# Altium PCB displayLCD.PcbDoc
Units mil, origin at the board's own origin, x right, y up, seen from the top; angles counter-clockwise.
Board outline 3797.48 x 1180 mil, 2 copper layers (Top Layer, Bottom Layer); 21 components, 19 nets, 127 pads, 53 vias.
Unrouted connection lines stored in the file: 9.
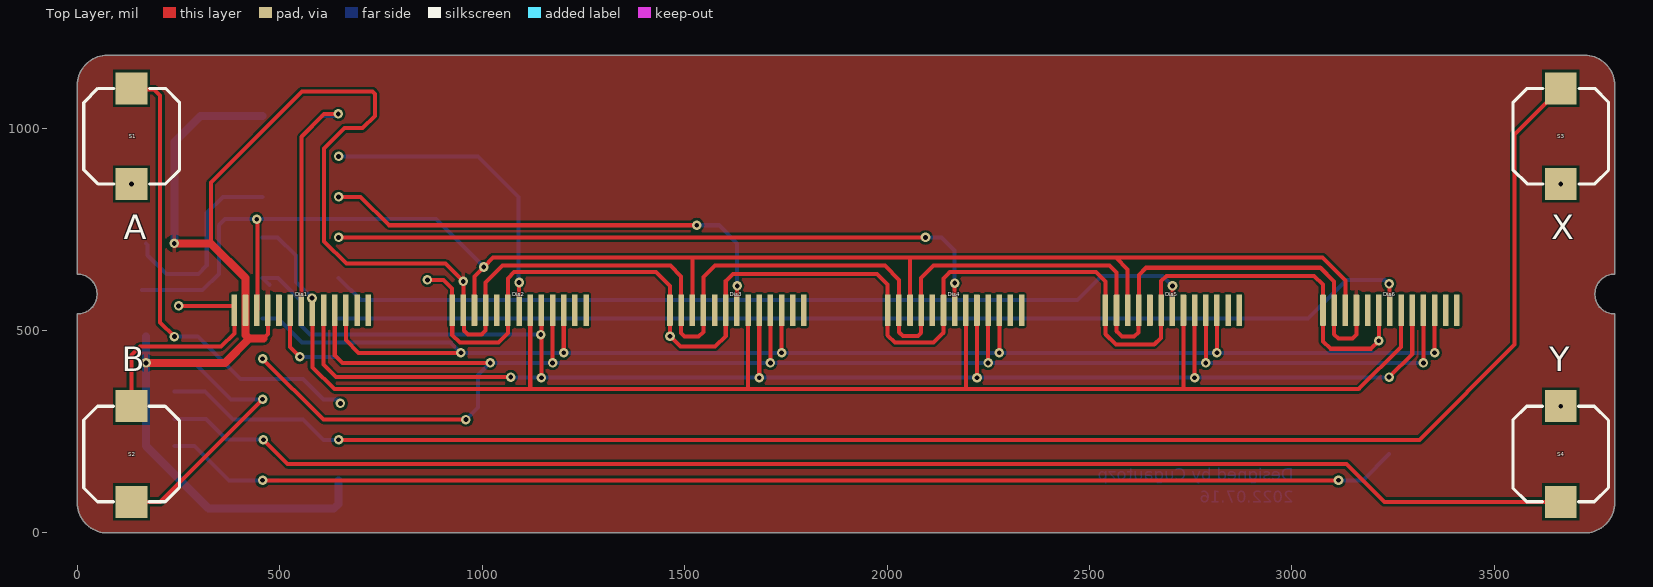
[diagram p0: Top Layer view]
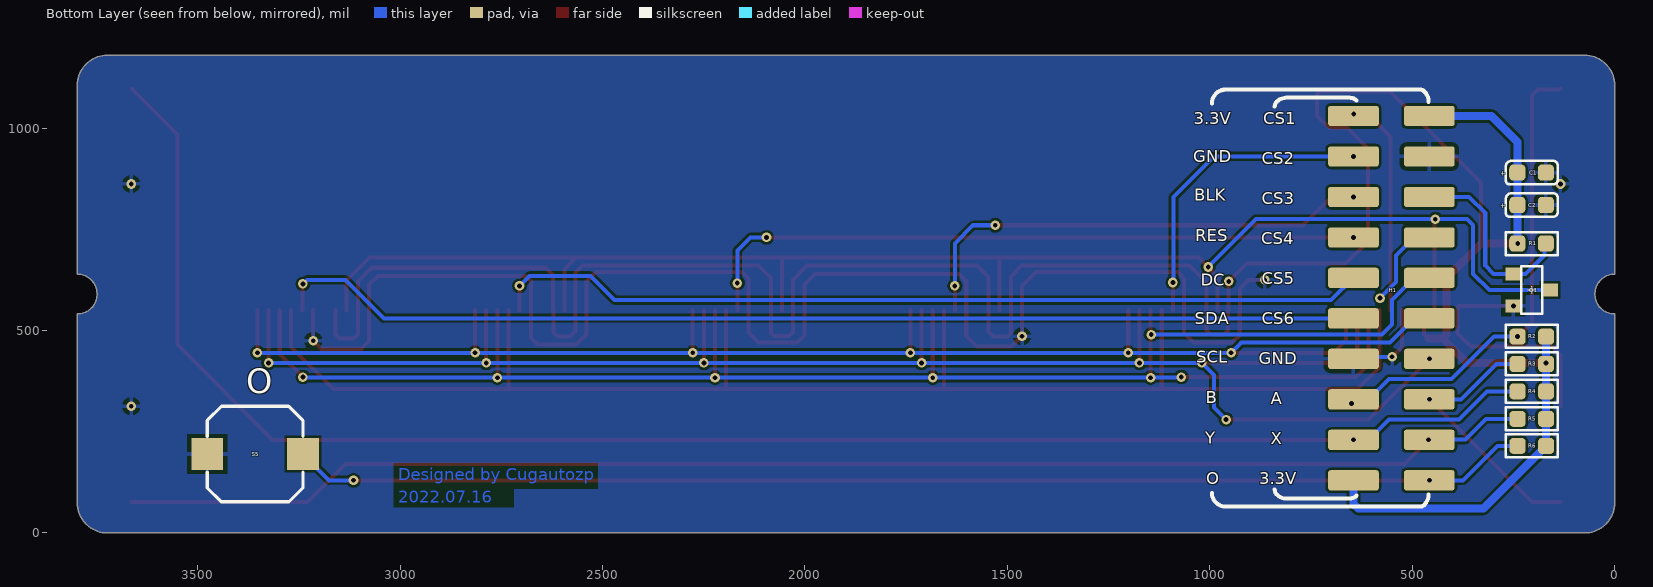
[diagram p1: Bottom Layer view, seen from below]
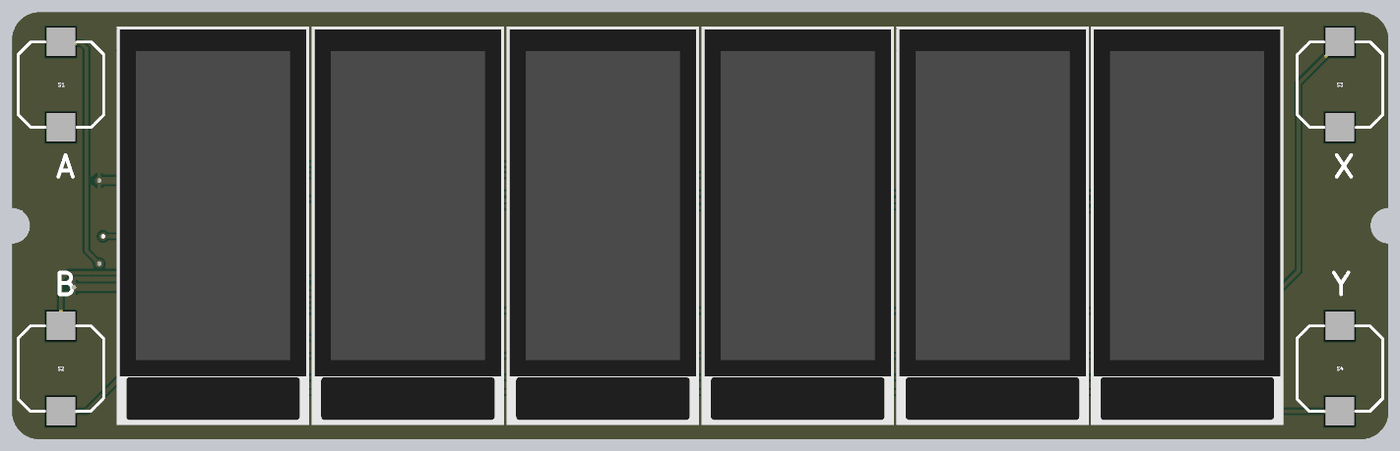
[diagram p2: 3D render of the assembled board from above, using the file's embedded part models]
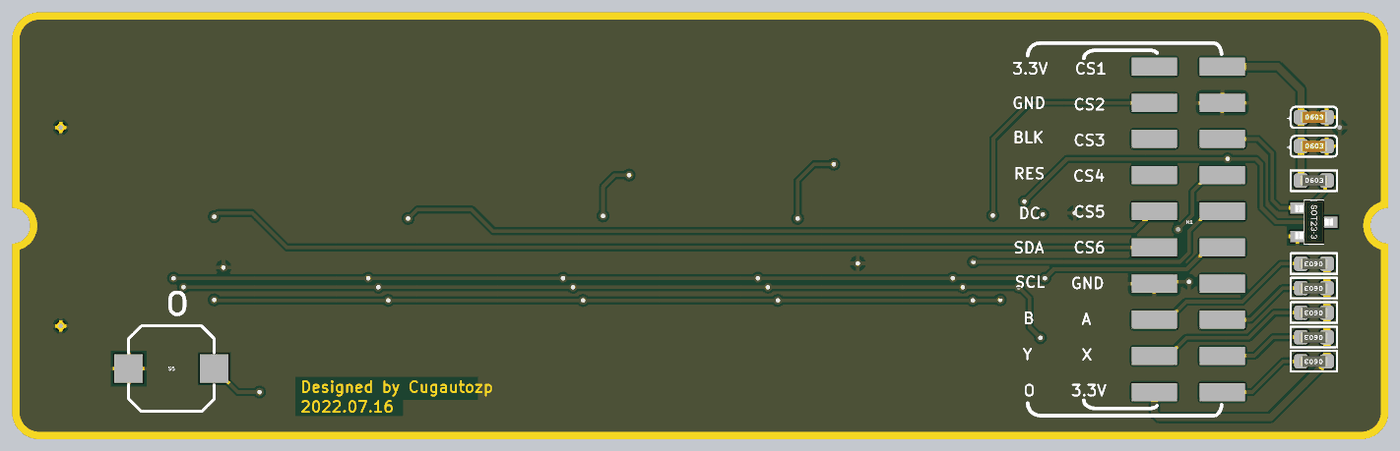
[diagram p3: 3D render of the assembled board from below, using the file's embedded part models]

## Layer stack, top to bottom
Top Solder: solder mask 0.4, Solder Resist, Dk 3.5
Top Layer: signal copper 1.4
Dielectric 1: dielectric 12.6, FR-4, Dk 4.8
Bottom Layer: signal copper 1.4
Bottom Solder: solder mask 0.4, Solder Resist, Dk 3.5

## Board outline
0,75 0,540.79 ccw(c0,590) 0,639.21 0,1105 cw(c75,1105) 75,1180 3722.48,1180 cw(c3722.48,1105) 3797.48,1105 3797.48,639.21 ccw(c3797.48,590) 3797.48,540.79 3797.48,75 cw(c3722.48,75) 3722.48,0 75,0 cw(c75,75)

## Design rules (kind name [scope] priority, off if disabled: settings)
Clearance [All] p1: gap=6 ignorepadtopadclearanceinfootprint=FALSE except(0: Arc-Hole Track-Hole SMDPad-Hole THPad-Hole Via-Hole Fill-Hole Poly-Hole Region-Hole Text-Hole)
PolygonConnect PolygonConnect_1 [All vs IsNamedPolygon('Top Layer-VCC')] p1: connectstyle=Relief reliefconductorwidth=10 reliefentries=4 polygonreliefangle="90 Angle" airgapwidth=10
PolygonConnect [All] p2: connectstyle=Relief reliefconductorwidth=10 reliefentries=4 polygonreliefangle="90 Angle" airgapwidth=10
RoutingVias [All] p1: holewidth=28 width=50 viastyle="Through Hole" minholewidth=28 minwidth=50 maxholewidth=28 maxwidth=50
SolderMaskExpansion [All] p1: expansion=4 istentingtop=FALSE
Width [All] p1: maxlimit=60 minlimit=10 preferedwidth=10
30 further rules are at their usual default settings.

## Components (designator, comment, footprint, x,y, rotation, side; value= is the part's Value field where it differs from the comment)
C1 "Cap Pol3" Cap0603 205.53,890 r180 bottom value=0.1uF
C2 "Cap Pol3" Cap0603 205.53,810 r180 bottom value=0.1uF
Dis1 "LCD80*160" LCD屏80*160 819.25,39.76 r90 top locked
Dis2 "LCD80*160" LCD屏80*160 1357.19,39.76 r90 top locked
Dis3 "LCD80*160" LCD屏80*160 1895.12,39.76 r90 top locked
Dis4 "LCD80*160" LCD屏80*160 2432.83,39.76 r90 top locked
Dis5 "LCD80*160" LCD屏80*160 2970.34,39.76 r90 top locked
Dis6 "LCD80*160" LCD屏80*160 3507.83,39.76 r90 top locked
H1 "双排2*10" pin20双排母 555,580 r270 bottom locked
Q1 "LN4812LT1G" sot23 160,600 r270 bottom
R1 "10k" R0603 207.28,715 r180 bottom value=10K
R2 "10k" R0603 203.28,485 r0 bottom value=10K
R3 "10k" R0603 203.28,417.25 r0 bottom value=10K
R4 "10k" R0603 203.28,349.5 r0 bottom value=10K
R5 "10k" R0603 203.28,281.75 r0 bottom value=10K
R6 "10k" R0603 203.28,215 r0 bottom value=10K
S1 "S1" key(按键) 134.25,980 r270 top
S2 "S2" key(按键) 134.25,195 r90 top
S3 "S3" key(按键) 3663.78,980 r270 top
S4 "S4" key(按键) 3663.78,195 r90 top
S5 "S5" key(按键) 3358.11,195 r0 bottom

## Footprints (in the part's own frame and the unit in brackets; to place one, negate y for a bottom-side part, rotate by r counter-clockwise, add the part's x,y. Pads: shape width x height; smd on the part's side, far side on the other; paste and mask are expansions set on the pad)
Cap0603 [mil]
  rrect50% 40x40 smd: 1(-35.25,0) 2(35.25,0)
  silkscreen extent -64,-29 64,29, body extent -39,-15 40,16, height 31
key(按键) [mm]
  rect 2x2 smd: 1(-3,0) 2(3,0)
  silkscreen extent -3,-3 3,3
LCD屏80*160 [mm]
  rrect25% 2x0.35 smd: 1(12.96,2.55) 2(12.96,3.25) 3(12.96,3.95) 4(12.96,4.65) 5(12.96,5.35) 6(12.96,6.05) 7(12.96,6.75) 8(12.96,7.45) 9(12.96,8.15) 10(12.96,8.85) 11(12.96,9.55) 12(12.96,10.25) 13(12.96,10.95)
  body extent -0.01,-0.01 27.95,13.47, height 1.87
pin20双排母 [mil]
  rrect25% 50x125.2 smd mask+0: 1(-450,-90.49) 2(-450,97.01) 3(-350,-90.49) 4(-350,97.01) 5(-250,-90.49) 6(-250,97.01) 7(-150,-90.49) 8(-150,97.01) 9(-50,-90.49) 10(-50,97.01) 11(50,-90.49) 12(50,97.01) 13(150,-90.49) 14(150,97.01) 15(250,-90.49) 16(250,97.01) 17(350,-90.49) 18(350,97.01) 19(450,-90.49) 20(450,97.01)
R0603 [mil]
  rrect50% 40x40 smd: 1(-33.5,0) 2(37,0)
  silkscreen extent -62,-29 66,28, body extent -38,-15 41,16, height 31
sot23 [mm]
  rect 0.8x1 smd: 1(-1,-2.3) 2(1,-2.3) 3(0,0)
  silkscreen extent -1.5,-1.8 1.5,-0.5, body extent -1.52,-2.46 1.52,0.18, height 1.01

## Part data
C1 C2: "Polarized Capacitor (Surface Mount)", LatestRevisionDate=29-May-2009, LatestRevisionNote="IPC-7351 Footprint Added.", PackageDescription="Chip Capacitor", PackageReference=C0805, Published=8-Jun-2000, Publisher="Altium Limited"
Q1: BOM_JLCPCB Part Class="Extended Part", BOM_Manufacturer=LRC(乐山无线电), BOM_Manufacturer Part=LN4812LT1G, BOM_Supplier=LCSC, BOM_Supplier Part=C559076, Contributor=LCSC, spicePre=Q, spiceSymbolName=LN4812LT1G
R1 R2 R3 R4 R5 R6: library part Res2, "Resistor", LatestRevisionDate=17-Jul-2002, LatestRevisionNote="Re-released for DXP Platform.", PackageDescription="Axial Device, Thru-Hole; 2 Leads; 0.4 in Pin Spacing", PackageReference=AXIAL-0.4, Published=8-Jun-2000, Publisher="Altium Limited"
S1 S2 S3 S4 S5: library part SW-PB, "Switch", LatestRevisionDate=17-Jul-2002, LatestRevisionNote="Re-released for DXP Platform.", PackageDescription="Switch; 2 Leads", PackageReference=SPST-2, Published=24-Mar-1999, Publisher="Altium Limited"

## Via types
v1: diameter 23.62, hole 11.81, Top Layer to Bottom Layer, tented both sides, 51 vias
v2: diameter 23.62, hole 11.81, Top Layer to Bottom Layer, 2 vias

## Nets (pads, with @x,y where several pads share a name; then routed paths per layer and width w, separated by ;. In a path a pad name is that pad's centre, name@x,y a point inside that pad or via, vN(x,y) a via of type N, cw(c..) or ccw(c..) an arc to the next point about the centre after c; other vN are vias at no path point)
BLK: H1.6 Q1.1 R1.2 | length 489
  Bottom Layer w10: R1.2 174.14,711.13 174.14,685.86 220.63,639.37 Q1.1 299.37,639.37 320,660 320,790 360,830 H1.6
CS1: Dis1.7 H1.1 | length 583.9
  Top Layer w10: Dis1.7 553.5,978.5 610,1035 v1(645,1035)
  Bottom Layer w10: H1.1@605,1030 H1.1
CS2: Dis2.7 H1.3 | length 766.5
  Top Layer w10: Dis2.7 v1(1091.44,618.56)
  Bottom Layer w10: v1(645.49,930) 990,930 1090,830 1090,620 v1(1091.44,618.56)
CS3: Dis3.7 H1.5 | length 1197.4
  Top Layer w10: v1(645.49,830) 700,830 770,760 v1(1530,760) ; Dis3.7 1630,550.63 v1(1630,610)
  Bottom Layer w10: v1(1530,760) 1585,760 1630,715 v1(1630,610)
CS4: Dis4.7 H1.7 | length 1691.7
  Top Layer w10: v1(645.49,730) v1(2095,730) v1@2100,730 ; Dis4.7 v1(2167.08,617.17) v1@2167.08,621.1
  Bottom Layer w10: v1(2095,730) 2135,730 2167.08,697.92 v1(2167.08,617.17)
CS5: Dis5.7 H1.9 | length 2177.5
  Top Layer w10: Dis5.7 v1@2704.59,610
  Bottom Layer w10: H1.9 700.49,575 2470,575 2530,635 2680,635 v1(2705,610)
CS6: Dis6.7 H1.11 | length 2703.9
  Top Layer w10: v1(3240,615) 3241.04,613.96 3241.04,551.05 Dis6.7
  Bottom Layer w10: H1.11 3040,530 3135,625 3230,625 v1(3240,615)
DC: Dis1.5 Dis2.5 Dis3.5 Dis4.5 Dis5.5 Dis6.5 H1.10 | length 4438.5
  Top Layer w10: Dis1.5 608.62,415.79 639.41,385 v1(1070.79,385) ; v1(1146.56,383.44) Dis2.5 ; v1(1684.49,383.44) Dis3.5 ; v1(2222.2,383.44) Dis4.5 ; v1(2759.71,383.44) Dis5.5 ; v1(3240,385) 3297.2,442.2 Dis6.5
  Bottom Layer w10: H1.10@475,612.99 H1.10 495.59,630 550,575.59 550,515 575,490 v1(1145,490) ; v1(1070.79,385) 1072.35,383.44 v1(1684.49,383.44) v1(2222.2,383.44) v1(2759.71,383.44) v1@3240,383.44
GND: C1.2 C2.2 Dis1.8 Dis1.13 Dis2.8 Dis2.13 Dis3.8 Dis3.13 Dis4.8 Dis4.13 Dis5.8 Dis5.13 Dis6.8 Dis6.13 H1.4 H1.13 Q1.2 S1.2 S2.2 S3.2 S4.2 S5.2 | length 4600.7
  Top Layer w10: S2.2 134.25,439.25 155,460 355,460 388.15,493.15 Dis1.13 388.15,558.74 386.26,560.63 v1(250.55,560.63) ; Dis1.8 525.94,459.06 v1(550,435) ; v1(865,625) 905,625 926.09,603.91 Dis2.13 926.28,549.81 926.28,488.72 945,470 1040,470 1063.88,493.88 Dis2.8 1063.88,628.88 1079,644 1430,644 1464.02,609.98 Dis3.13 v1(1464.02,485.98) 1490,460 1575,460 1601.81,486.81 Dis3.8 1601.81,621.81 1620,640 1975,640 2001.73,613.27 Dis4.13 2001.73,488.27 2020,470 2115,470 2139.52,494.52 Dis4.8 2139.52,628.52 2155,644 2516,644 2539.24,620.76 Dis5.13 2539.24,490.76 2565,465 2660,465 2677.03,482.03 Dis5.8 2677.03,622.03 2690,635 3055,635 3076.73,613.27 Dis6.13 3076.73,473.27 3095,455 3195,455 v1(3214.52,474.52) Dis6.8
  Bottom Layer w10: v1(550,435) 640.49,435 H1.13
  other v1: 134.25,861.89
  other v2: 3663.78,313.11 3663.78,861.89
KEY1: H1.15 R2.2 S1.1 | length 1157.3
  Top Layer w10: S1.1 137.36,1095 190,1095 205,1080 205,520.28 v1(240.28,485)
  Bottom Layer w10: v1(240.28,485) 297.84,485 402.84,380 557.89,380 607.89,330 H1.15
  other v1: 650,320
KEY2: H1.16 R3.2 S2.1 | length 682.4
  Top Layer w10: S2.1 204.88,76.89 355,227.01 v1(457.99,330)
  Bottom Layer w10: R3.2 292.75,417.25 380,330 v1(457.99,330)
KEY3: H1.17 R4.2 S3.1 | length 4136.8
  Top Layer w10: v1(645.49,230) 3315,230 3550,465 3550,984.33 S3.1
  Bottom Layer w10: R4.2 315.2,349.5 384.7,280 557.89,280 607.89,230 v1(645.49,230)
KEY4: H1.18 R5.2 S4.1 | length 3506.3
  Top Layer w10: v1(460,230) 520,170 3135,170 3228.11,76.89 S4.1
  Bottom Layer w10: R5.2 318.25,281.75 369.3,230.7 457.29,230.7 H1.18
KEY5: H1.20 R6.2 S5.1 | length 3099.5
  Top Layer w10: v1(457.99,130) v1(3115,130)
  Bottom Layer w10: R6.2 290,215 375,130 v1(457.99,130) H1.20@495.59,130 ; v1(3115,130) 3175,130 S5.1
LEDK: Dis1.11 Dis2.11 Dis3.11 Dis4.11 Dis5.11 Dis6.11 Q1.3 | length 4014.9
  Top Layer w10: Dis1.11 445,551.73 445,773.27 v1(443.27,775) ; Dis2.11 981.21,633.79 v1(1004.32,656.89) 1027.42,680 1519.14,680 ; Dis3.11 1519.14,680 ; Dis4.11 2056.85,680 ; Dis5.11 2594.36,650.64 2565,680 ; Dis6.11 3131.85,623.15 3075,680 2565,680 ; 1519.14,680 2056.85,680 ; 2056.85,680 2565,680
  Bottom Layer w10: Q1.3 310,600 350,640 350,760 365,775 v1(443.27,775) 886.21,775 v1(1004.32,656.89)
RES: Dis1.6 Dis2.6 Dis3.6 Dis4.6 Dis5.6 Dis6.6 H1.8 | length 3990.1
  Top Layer w10: Dis1.6 581.06,408.94 635,355 1120,355 ; Dis2.6 1119,356 1120,355 ; Dis3.6 1656.93,356.93 1655,355 ; Dis4.6 2194.64,355.36 2195,355 ; Dis5.6 2732.15,357.15 2730,355 ; Dis6.6 3269.64,459.64 3165,355 2730,355 ; 1120,355 1655,355 ; 1655,355 2195,355 ; 2195,355 2730,355
  Bottom Layer w10: H1.8 494.91,730 540,684.91 540,620 v1(580,580)
SCL: Dis1.4 Dis2.4 Dis3.4 Dis4.4 Dis5.4 Dis6.4 H1.14 | length 4186.6
  Top Layer w10: v1(457.99,430) 607.99,280 v1(960,280) ; Dis1.4 636.18,438.82 655,420 v1(1020,420) ; v1(1174.12,420) Dis2.4 ; v1(1712.05,420) Dis3.4 ; v1(2249.76,420) Dis4.4 ; v1(2787.27,420) Dis5.4 ; v1(3324.76,420) Dis6.4
  Bottom Layer w10: v1(960,280) 990,310 990,390 v1(1020,420) v1(3324.76,420)
SDA: Dis1.3 Dis2.3 Dis3.3 Dis4.3 Dis5.3 Dis6.3 H1.12 | length 3825.1
  Top Layer w10: Dis1.3 663.74,476.26 695,445 v1(947.6,445) ; v1(1201.68,445) Dis2.3 ; v1(1739.61,445) Dis3.3 ; v1(2277.32,445) Dis4.3 ; v1(2814.83,445) Dis5.3 ; v1(3352.32,445) Dis6.3
  Bottom Layer w10: H1.12 495.59,530 555.59,470 922.6,470 v1(947.6,445) v1(1201.68,445) v1(1739.61,445) v1(2277.32,445) v1(2814.83,445) v1(3352.32,445)
VCC3.3: C1.1 C2.1 Dis1.10 Dis1.12 Dis2.10 Dis2.12 Dis3.10 Dis3.12 Dis4.10 Dis4.12 Dis5.10 Dis5.12 Dis6.10 Dis6.12 H1.2 H1.19 R1.1 R2.1 R3.1 R4.1 R5.1 R6.1 | length 7197.9
  Top Layer w10: 330,715 330,865 555,1090 729.14,1090 735,1084.14 735,1057.07 735,1030 705,1000 660,1000 610,950 610,720 665,665 910,665 v1(953.65,621.35) Dis2.12 955.54,548.11 955.54,499.46 965,490 999.14,490 1008.76,499.62 Dis2.10 1008.76,618.76 1050,660 1465,660 1491.58,633.42 Dis3.12 1491.58,493.42 1500,485 1535,485 1546.69,496.69 Dis3.10 1546.69,631.69 1575,660 1995,660 2030,625 2030,550.71 Dis4.12 2029.29,495.71 2039,486 2076,486 2084.4,494.4 Dis4.10 2084.4,629.4 2115,660 2550,660 2566.8,643.2 Dis5.12 2566.8,498.2 2580,485 2610,485 2620.63,495.63 2620.63,548.72 Dis5.10 2621.91,636.91 2640,655 3070,655 3104.29,620.71 Dis6.12 3104.29,490.71 3115,480 3149.14,480 3159.4,490.26 Dis6.10 ; 460,480 470.82,490.82 Dis1.10
  Top Layer w20: v1(170,420) 365,420 425,480 ; v1(240,715) 330,715 415.71,629.29 Dis1.12 415.71,489.29 425,480 ; 460,480 425,480
  Bottom Layer w20: R2.1 R3.1 R4.1 R5.1 R6.1 324.78,60 633.77,60 645.49,71.72 H1.19 ; R1.1 C2.1 C1.1 240.78,965.78 305,1030 H1.2
pads on no net: Dis1.1 Dis1.2 Dis1.9 Dis2.1 Dis2.2 Dis2.9 Dis3.1 Dis3.2 Dis3.9 Dis4.1 Dis4.2 Dis4.9 Dis5.1 Dis5.2 Dis5.9 Dis6.1 Dis6.2 Dis6.9

## Polygon pours and split planes (outlines as drawn)
VCC3.3 on Top Layer "VCC" (solid, pour order 1): 0,75 0,540.79 ccw(c0,590) 0,639.21 0,1105 cw(c75,1105) 75,1180 3722.48,1180 cw(c3722.48,1105) 3797.48,1105 3797.48,639.21 ccw(c3797.48,590) 3797.48,540.79 3797.48,75 cw(c3722.48,75) 3722.48,0 75,0 cw(c75,75)
GND on Bottom Layer "GND" (solid, pour order 2): 0,75 0,540.79 ccw(c0,590) 0,639.21 0,1105 cw(c75,1105) 75,1180 3722.48,1180 cw(c3722.48,1105) 3797.48,1105 3797.48,639.21 ccw(c3797.48,590) 3797.48,540.79 3797.48,75 cw(c3722.48,75) 3722.48,0 75,0 cw(c75,75)

## Other copper
Bottom Layer:
  text "Designed by Cugautozp" at 3005,130 h30
  text "2022.07.16" at 3005,75 h30

## Silkscreen, mask and mechanical layers (free items; w line width, h text height)
Top Overlay:
  text "A" at 115,725 h60
  text "X" at 3640,725 h60
  text "B" at 110,400 h60
  text "Y" at 3635,400 h60
Bottom Overlay:
  lines w10: 460,95 ccw(c496.21,95) 470.61,69.39 ccw(c481.21,80) 481.21,65 960.86,65 ccw(c960.86,99.14) 985,75 ccw(c960.86,99.14) 995,99.14 ; 460,1065 cw(c496.21,1065) 470.61,1090.61 cw(c481.21,1080) 481.21,1095 960.86,1095 cw(c960.86,1060.86) 985,1085 cw(c960.86,1060.86) 995,1060.86 ; 637.93,92.07 ccw(c655,109.14) 655,85 810.86,85 ccw(c810.86,119.14) 835,95 ccw(c822.93,107.07) 840,107.07 ; 637.93,1067.93 cw(c655,1050.86) 655,1075 810.86,1075 cw(c810.86,1040.86) 835,1065 cw(c822.93,1052.93) 840,1052.93
  text "CS1" at 867.99,1010 h30
  text "3.3V" at 1040,1010 h30
  text "GND" at 1040.57,915 h30
  text "CS2" at 871.56,911.11 h30
  text "+" at 283,882 h12
  text "BLK" at 1038.79,820 h30
  text "CS3" at 871.56,812.22 h30
  text "+" at 283,802 h12
  text "RES" at 1036.5,720 h30
  text "CS4" at 872.99,713.33 h30
  text "CS5" at 871.56,614.44 h30
  text "DC" at 1023.08,610 h30
  text "CS6" at 871.56,515.56 h30
  text "SDA" at 1037.43,515 h30
  text "SCL" at 1034,420 h30
  text "GND" at 878.84,416.67 h30
  text "O" at 3380,345 h60
  text "B" at 1010.36,320 h30
  text "A" at 849.35,317.78 h30
  text "Y" at 1011.79,220 h30
  text "X" at 849.35,218.89 h30
  text "3.3V" at 878.27,120 h30
  text "O" at 1009.65,120 h30
Bottom Solder:
  the board outline again, w40
  text "Designed by Cugautozp" at 3005,130 h30
  text "2022.07.16" at 3005,75 h30
Mechanical 1:
  the board outline again, w10

## Text inside footprints (layer, text, board x,y; h text height)
Dis1: Mechanical 7 "1" at 727.87,600.08 h27.2; Mechanical 7 "13" at 359.25,600.08 h27.2
Dis2: Mechanical 7 "1" at 1265.81,600.08 h27.2; Mechanical 7 "13" at 897.19,600.08 h27.2
Dis3: Mechanical 7 "1" at 1803.74,600.08 h27.2; Mechanical 7 "13" at 1435.12,600.08 h27.2
Dis4: Mechanical 7 "1" at 2341.45,600.08 h27.2; Mechanical 7 "13" at 1972.83,600.08 h27.2
Dis5: Mechanical 7 "1" at 2878.96,600.08 h27.2; Mechanical 7 "13" at 2510.34,600.08 h27.2
Dis6: Mechanical 7 "1" at 3416.45,600.08 h27.2; Mechanical 7 "13" at 3047.83,600.08 h27.2